# Altium PCB RF-UNIT.PcbDoc (part 3 of 4)
Units mm, origin at the board's own origin, x right, y up, seen from the top; angles counter-clockwise.
Board outline 187 x 77 mm, 2 copper layers (Top Layer, Top, Bottom Layer, Bottom); 271 components, 171 nets, 804 pads, 2169 vias.
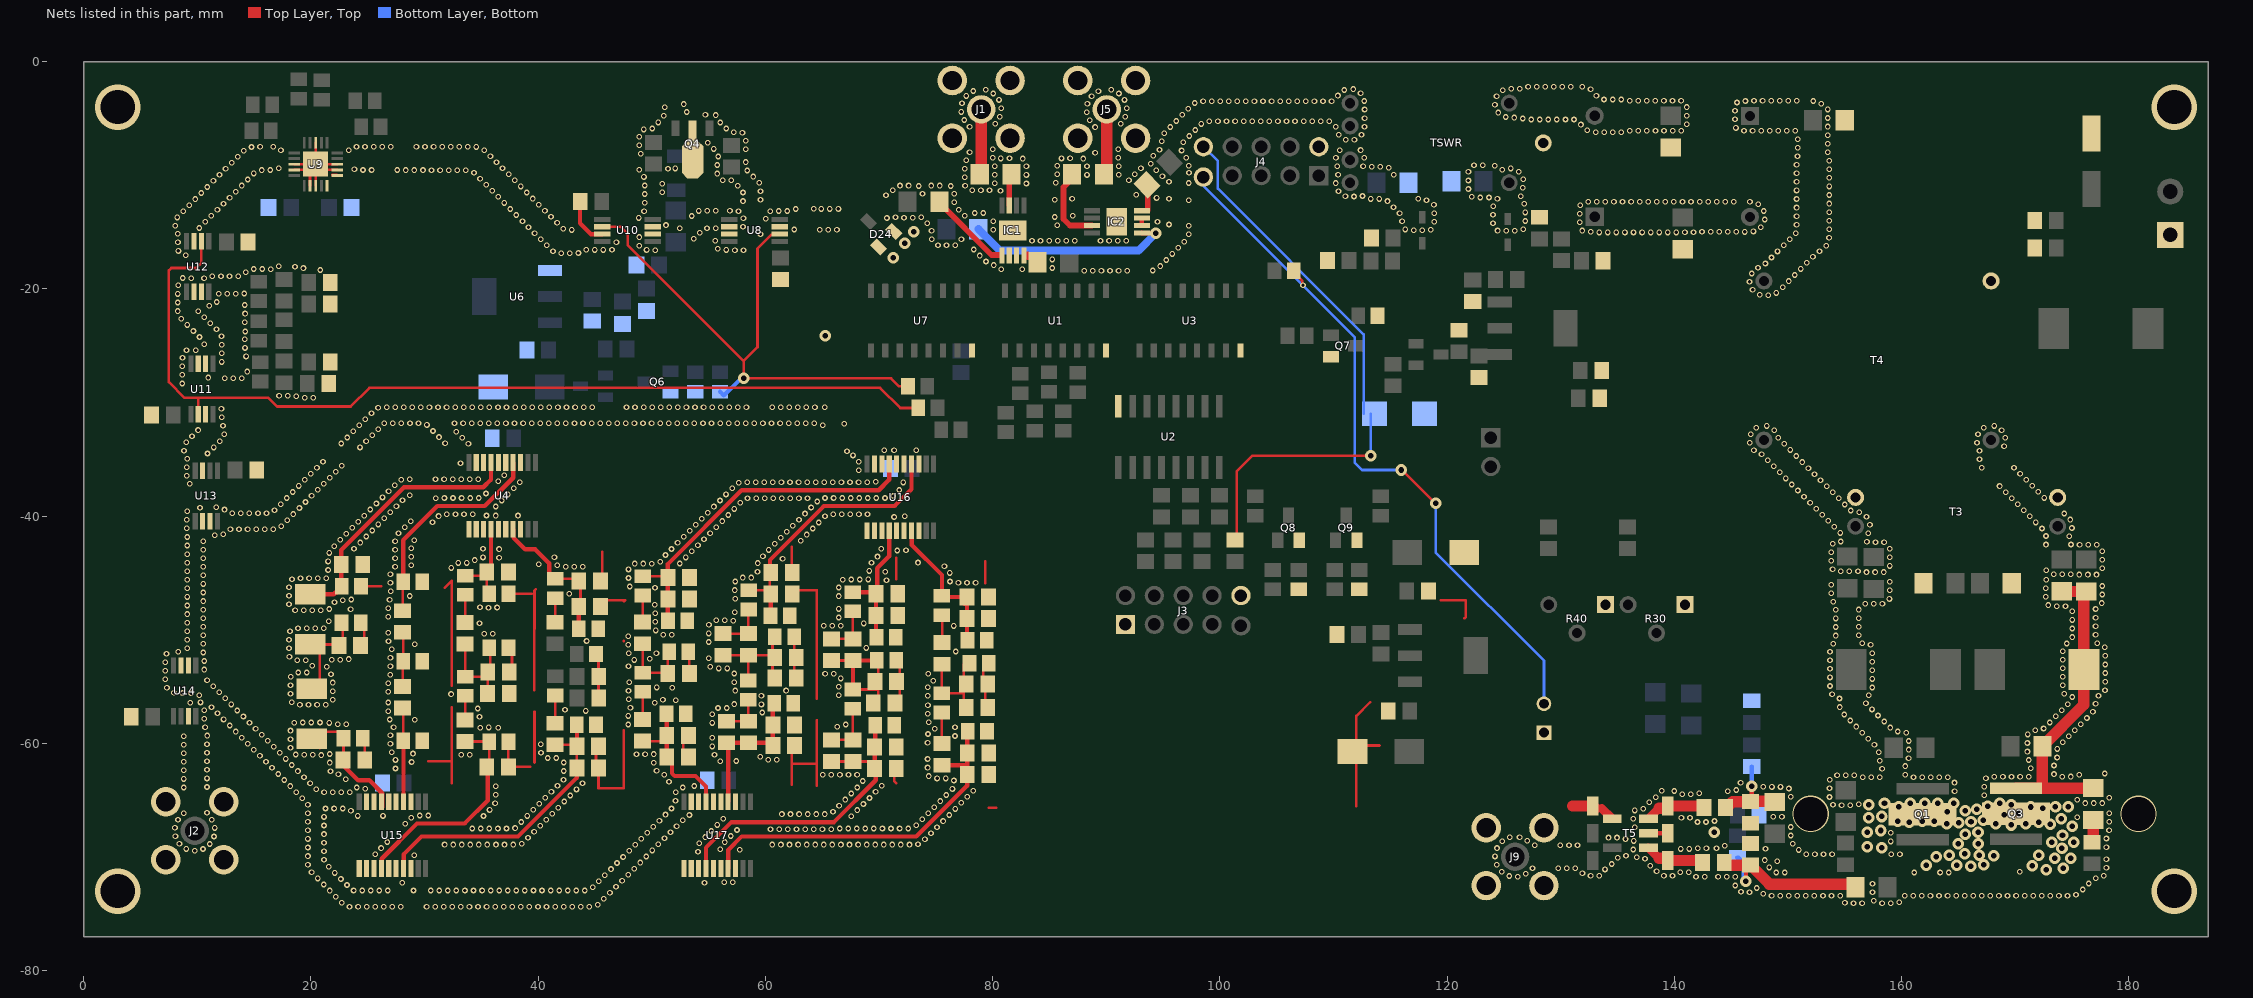
[diagram p3: the nets of this part, all layers, seen from the top]

## Via types
v1: diameter 0.5, hole 0.3, Top Layer, Top to Bottom Layer, Bottom, tented both sides, 1697 vias
v2: diameter 0.5, hole 0.3, Top Layer, Top to Bottom Layer, Bottom, 318 vias
v3: diameter 1.016, hole 0.486, Top Layer, Top to Bottom Layer, Bottom, tented both sides, 136 vias
v4: diameter 0.8, hole 0.486, Top Layer, Top to Bottom Layer, Bottom, tented both sides, 12 vias
v5: diameter 4, hole 3, Top Layer, Top to Bottom Layer, Bottom, 4 vias
v6: diameter 3.2, hole 3, Top Layer, Top to Bottom Layer, Bottom, 2 vias

## Nets (pads, with @x,y where several pads share a name; then routed paths per layer and width w, separated by ;. In a path a pad name is that pad's centre, name@x,y a point inside that pad or via, vN(x,y) a via of type N, cw(c..) or ccw(c..) an arc to the next point about the centre after c; other vN are vias at no path point) (continued)
GND: C1.1 C2.1 C3.1 C4.1 C7.1 C13.1 C14.1 C15.1 C22.1 C23.1 C24.1 C25.1 C26.1 C27.1 C34.1 C35.1 C36.1 C37.1 C39.1 C46.1 C47.1 C48.1 C49.1 C50.1 C51.1 C60.1 C61.1 C62.1 C63.1 C64.1 C65.1 C74.1 C75.1 C76.1 C77.1 C78.1 C79.1 C88.1 C89.1 C90.1 C95.2 C96.1 C97.2 C100.2 C104.1 C105.2 C107.1 C108.1 C109.1 C110.1 C113.2 C114.2 C115.1 C116.2 C117.1 C118.1 C119.2 C121.1 C122.1 C123.1 C124.1 C125.1 C126.1 C127.1 C128.2 C129.2 C130.1 C131.1 C132.1 C133.1 C134.1 C135.1 C136.1 C137.2 C139.1 C140.1 C141.1 C142.1 D2.2 D24.1 D24.2 IC1.6 IC1.7 IC1.9 IC2.6 IC2.7 IC2.9 J1.1 J1.2 J1.3 J1.4 J2.1 J2.2 J2.3 J2.4 J3.1 J3.10 J4.2 J5.1 J5.2 J5.3 J5.4 J8.1 J9.1 J9.2 J9.3 J9.4 L1.1 L2.1 L3.1 L4.1 L5.1 L6.1 L9.1 L10.1 L11.1 L14.1 L15.1 L16.1 L19.1 L20.1 L21.1 L24.1 L25.1 L26.1 L29.1 L30.1 L31.1 L34.1 L35.1 L36.1 Q1.2 Q3.2 Q4.0 Q4.2 Q6.2 Q7.2 Q8.2 Q9.2 R2.2 R6.1 R14.1 R30.1 R33.1 R36.2 R40.1 R42.1 R43.2 R45.1 R53.2 R54.1 R55.2 R56.2 R70.1 T3.2 T3.3 T4.4 T5.2 T5.4 T5.8 T5.11 TSWR.7 U1.8 U2.8 U3.8 U4.3 U4.5 U4.6 U4.8 U4.9 U4.11 U4.12 U4.13 U4.15 U4.16 U4.18 U6.1 U7.8 U8.3 U8.6 U8.7 U9.3 U9.4 U9.7 U9.8 U9.10 U9.11 U9.12 U9.13 U9.18 U9.21 U10.3 U10.6 U10.7 U11.3 U11.6 U11.7 U12.3 U12.6 U12.7 U13.3 U13.6 U13.7 U14.3 U14.6 U14.7 U15.3 U15.5 U15.6 U15.8 U15.9 U15.11 U15.12 U15.13 U15.15 U15.16 U15.18 U16.3 U16.5 U16.6 U16.8 U16.9 U16.11 U16.12 U16.13 U16.15 U16.16 U16.18 U17.3 U17.5 U17.6 U17.8 U17.9 U17.11 U17.12 U17.13 U17.15 U17.16 U17.18 | length 153.1
  Top Layer, Top w0.23: U9.4@18.522,-9.529 19.922,-9.529 U9.7@19.922,-10.929 ; U9.3@18.522,-9.029 U9.21@20.422,-9.029 ; U9.8@20.422,-10.929 U9.21@20.422,-9.029 ; U9.18@20.422,-7.129 U9.21@20.422,-9.029 ; U9.21@20.922,-9.529 U9.12@22.322,-9.529 ; U9.11@21.902,-9.964 U9.11@22.257,-9.964 ; U9.13@22.322,-9.029 U9.21@20.422,-9.029 ; L35.1@24.397,-49.398 24.709,-49.711 C89.1@24.709,-51.303 ; L34.1@24.416,-46.173 26.208,-46.173 ; L36.1@24.575,-59.558 24.733,-59.717 C90.1@24.733,-61.463 ; 30.321,-61.59 32.39,-61.59 ; 31.796,-46.3 32.385,-45.71 32.385,-47.615 32.39,-47.62 32.39,-54.918 32.385,-54.923 ; 32.385,-56.823 32.39,-56.828 32.39,-61.59 ; 32.39,-63.495 32.39,-61.59 ; L6.1@37.387,-59.838 C15.1@37.387,-62.06 39.297,-62.06 ; L5.1@37.387,-51.583 37.699,-51.895 C14.1@37.699,-53.488 ; L4.1@37.387,-46.82 37.392,-46.815 39.419,-46.815 ; 39.673,-57.229 39.678,-57.234 39.678,-61.679 ; 39.673,-55.329 39.673,-49.937 39.678,-49.932 39.678,-46.556 39.8,-46.434 ; C24.1@45.089,-60.125 45.089,-61.805 45.314,-62.03 45.314,-63.935 47.541,-63.935 47.541,-58.855 47.536,-58.85 ; L10.1@45.089,-52.136 45.309,-52.356 C26.1@45.309,-55.946 ; C22.1@45.426,-47.311 45.509,-47.394 47.652,-47.394 47.541,-47.504 ; C25.1@45.631,-45.361 45.631,-43.138 ; 47.536,-50.989 47.541,-50.984 ; C36.1@52.777,-59.802 52.777,-61.481 C39.1@53.002,-61.707 ; C34.1@53.135,-46.784 C34.1@53.14,-46.779 ; L15.1@53.227,-51.945 53.315,-52.033 C35.1@53.315,-53.85 ; C46.1@62.081,-46.525 62.085,-46.52 64.528,-46.52 64.533,-46.525 64.533,-50.018 64.528,-50.023 64.528,-56.05 ; C51.1@62.213,-59.901 62.306,-59.993 62.306,-61.806 ; 62.306,-63.619 62.306,-61.806 ; C49.1@62.306,-44.62 62.306,-42.715 ; C50.1@62.526,-54.422 62.526,-50.617 L20.1@62.531,-50.612 ; 64.528,-57.95 64.533,-57.955 64.533,-61.806 ; 64.533,-63.711 64.533,-61.806 ; C65.1@71.357,-61.595 71.357,-63.341 71.516,-63.5 ; L25.1@71.516,-52.705 71.828,-53.017 C64.1@71.828,-56.515 ; 71.516,-45.561 71.516,-43.656 ; L30.1@79.191,-53.032 79.191,-54.783 79.345,-54.937 C78.1@79.345,-56.842 ; 79.35,-45.888 79.35,-43.983 ; 79.661,-65.659 80.335,-65.659 ; 112.002,-65.522 112.021,-65.503 112.021,-61.511 112.09,-61.511 C100.2@112.09,-59.871 ; 113.221,-56.381 112.01,-57.592 112.01,-60.191 114.054,-60.191 ; 119.45,-47.412 121.649,-47.412 121.654,-47.407 121.654,-48.865 121.519,-49 ; 62.306,-61.806 64.533,-61.806
  Top Layer, Top w0.381: U9.21@19.922,-9.529 U9.21@20.422,-9.029 U9.21@20.922,-9.529 ; C135.1@43.7,-12.319 43.688,-12.331 43.688,-14.224 44.648,-15.184 U10.3@45.654,-15.184 ; IC2.6@93.132,-14.422 IC2.7@93.132,-13.772 ; T5.8@137.716,-67.915 T5.2@139.427,-67.915
  Top Layer, Top w0.76: 133.6,-65.708 T5.11@134.537,-66.645
  Top Layer, Top w1: 131.04,-65.515 T5.4@132.826,-65.515 T5.4@133.02,-65.708
  other v1: 23.397,-74.368 24.151,-74.368 24.905,-74.368 25.659,-74.368 26.413,-74.368 27.167,-74.368 27.921,-74.368 30.183,-74.368 30.937,-74.368 31.691,-74.368 32.445,-74.368 33.199,-74.368 33.953,-74.368 34.707,-74.368 35.461,-74.368 36.215,-74.368 36.969,-74.368 37.723,-74.368 38.477,-74.368 39.231,-74.368 39.985,-74.368 40.739,-74.368 41.493,-74.368 42.247,-74.368 43.001,-74.368 43.755,-74.368 44.509,-74.368 45.247,-74.215 155.769,-74.058 156.523,-74.058 158.283,-74.058 159.037,-74.058 22.728,-74.021 155.015,-74.03 159.789,-73.993 157.556,-73.858 45.788,-73.688 22.195,-73.488 148.557,-73.409 149.311,-73.409 150.065,-73.409 150.819,-73.409 151.573,-73.409 152.327,-73.409 153.081,-73.409 153.835,-73.409 154.589,-73.409 160.276,-73.417 161.03,-73.412 161.784,-73.412 162.538,-73.412 163.292,-73.411 164.046,-73.411 164.8,-73.41 165.554,-73.41 166.308,-73.41 167.062,-73.409 167.816,-73.409 168.57,-73.409 169.324,-73.409 170.078,-73.409 170.832,-73.409 171.586,-73.409 172.34,-73.409 173.094,-73.409 173.848,-73.409 174.602,-73.409 175.352,-73.328 147.822,-73.239 46.321,-73.155 146.616,-73.113 157.439,-73.113 145.864,-73.06 21.661,-72.955 23.756,-72.952 24.51,-72.952 25.264,-72.952 26.018,-72.952 26.772,-72.952 29.034,-72.952 30.542,-72.952 31.296,-72.952 32.05,-72.952 32.804,-72.952 33.558,-72.952 34.312,-72.952 35.066,-72.952 35.82,-72.952 36.574,-72.952 37.328,-72.952 38.082,-72.952 38.836,-72.952 39.59,-72.952 40.344,-72.952 41.098,-72.952 41.852,-72.952 42.606,-72.952 43.36,-72.952 44.114,-72.952 175.947,-72.865 147.266,-72.73 44.81,-72.663 46.854,-72.622 145.352,-72.507 23.178,-72.468 21.128,-72.422 157.439,-72.359 176.48,-72.331 28.037,-72.261 54.644,-72.261 56.376,-72.236 57.13,-72.226 45.344,-72.13 47.387,-72.089 22.644,-71.935 20.595,-71.889 177.076,-71.87 141.91,-71.749 142.664,-71.749 143.848,-71.749 144.602,-71.749 145.356,-71.753 126.219,-71.725 125.467,-71.671 177.801,-71.663 132.629,-71.654 133.383,-71.642 139.085,-71.654 139.839,-71.654 45.877,-71.596 47.92,-71.556 126.93,-71.474 22.111,-71.402 131.911,-71.425 20.062,-71.355 148.962,-71.361 149.716,-71.361 161.127,-71.365 163.389,-71.364 164.143,-71.363 140.524,-71.338 141.278,-71.338 124.811,-71.3 170.413,-71.299 138.438,-71.266 133.901,-71.094 46.41,-71.063 48.453,-71.023 127.517,-71.001 129.779,-71.001 130.533,-71.001 131.287,-71.001 178.029,-70.944 148.351,-70.919 21.578,-70.869 137.869,-70.771 19.739,-70.674 124.37,-70.689 134.486,-70.619 46.943,-70.53 48.986,-70.489 149.054,-70.365 147.963,-70.272 21.155,-70.245 178.029,-70.19 137.422,-70.164 135.012,-70.079 136.68,-70.029 47.476,-69.997 49.52,-69.956 124.216,-69.95 19.739,-69.92 135.744,-69.899 29.09,-69.847 25.657,-69.757 151.621,-69.748 152.375,-69.748 153.129,-69.748 153.883,-69.748 159.102,-69.748 159.856,-69.748 54.07,-69.536 21.155,-69.491 9.766,-69.458 48.009,-69.464 50.053,-69.423 150.963,-69.379 57.753,-69.36 56.03,-69.328 136.378,-69.339 10.504,-69.3 9.031,-69.29 140.566,-69.291 141.32,-69.291 148.027,-69.262 142.071,-69.221 142.825,-69.221 143.712,-69.226 26.179,-69.213 124.39,-69.217 19.739,-69.166 178.029,-69.13 144.437,-69.019 127.71,-68.953 129.972,-68.953 130.726,-68.953 131.48,-68.953 48.542,-68.931 31.766,-68.907 32.52,-68.907 33.274,-68.907 34.028,-68.907 34.782,-68.907 35.536,-68.907 36.29,-68.907 37.044,-68.907 37.798,-68.907 50.586,-68.89 60.618,-68.907 61.372,-68.907 62.126,-68.907 62.88,-68.907 63.634,-68.907 64.388,-68.907 65.142,-68.907 65.896,-68.907 66.65,-68.907 67.404,-68.907 68.158,-68.907 68.912,-68.907 69.666,-68.907 70.42,-68.907 71.174,-68.907 71.928,-68.907 72.682,-68.907 73.435,-68.886 11.111,-68.853 150.43,-68.845 8.432,-68.833 38.547,-68.822 54.187,-68.791 21.155,-68.737 56.424,-68.685 26.712,-68.68 124.853,-68.622 159.038,-68.632 136.431,-68.586 127.057,-68.577 74.042,-68.438 19.739,-68.412 135.698,-68.424 49.076,-68.397 51.119,-68.357 178.029,-68.376 39.109,-68.319 134.202,-68.291 134.956,-68.291 125.521,-68.272 54.706,-68.245 126.377,-68.25 11.476,-68.193 8.077,-68.168 56.958,-68.152 150.258,-68.111 21.155,-67.983 74.575,-67.905 159.06,-67.879 49.609,-67.864 51.652,-67.824 39.642,-67.786 55.239,-67.712 19.739,-67.658 178.26,-67.659 57.499,-67.628 60.452,-67.564 61.214,-67.564 61.976,-67.564 62.738,-67.564 63.5,-67.564 64.262,-67.564 65.024,-67.564 65.786,-67.564 34.201,-67.491 34.955,-67.491 35.709,-67.491 36.463,-67.491 37.217,-67.491 66.535,-67.491 67.289,-67.491 68.043,-67.491 68.797,-67.491 69.551,-67.491 70.305,-67.491 71.059,-67.491 71.813,-67.491 72.567,-67.491 11.525,-67.441 37.97,-67.454 8.036,-67.415 75.108,-67.372 136.522,-67.379 150.258,-67.357 50.142,-67.331 52.185,-67.291 40.175,-67.253 21.155,-67.229 73.267,-67.21 55.772,-67.178 28.311,-67.08 38.504,-66.921 142.036,-66.923 142.79,-66.923 19.739,-66.904 178.28,-66.905 75.641,-66.838 143.538,-66.832 50.675,-66.798 52.719,-66.757 11.267,-66.732 8.308,-66.711 40.708,-66.719 73.8,-66.677 56.305,-66.645 136.378,-66.639 141.378,-66.555 28.846,-66.549 140.624,-66.542 175.452,-66.516 21.155,-66.475 148.714,-66.462 149.468,-66.462 67.566,-66.404 24.118,-66.385 26.349,-66.385 35.194,-66.391 39.037,-66.388 29.573,-66.348 30.327,-66.348 53.318,-66.3 76.174,-66.305 51.208,-66.265 61.459,-66.221 62.213,-66.221 62.967,-66.221 63.721,-66.221 64.475,-66.221 65.229,-66.221 41.241,-66.186 8.807,-66.146 19.739,-66.15 74.333,-66.144 178.28,-66.151 10.854,-66.101 65.954,-66.014 23.524,-65.921 136.529,-65.9 68.099,-65.871 35.727,-65.858 39.57,-65.855 76.707,-65.772 137.266,-65.741 21.286,-65.732 22.04,-65.732 22.794,-65.732 51.741,-65.732 41.774,-65.653 74.866,-65.611 66.487,-65.48 154.717,-65.446 155.471,-65.446 19.739,-65.396 153.965,-65.403 156.221,-65.368 68.632,-65.338 40.103,-65.322 36.21,-65.279 176.166,-65.255 176.92,-65.255 177.674,-65.255 77.24,-65.239 137.78,-65.189 42.307,-65.12 75.399,-65.077 52.089,-65.063 175.468,-64.969 67.02,-64.947 19.247,-64.825 69.166,-64.805 40.636,-64.788 178.27,-64.794 138.377,-64.729 77.774,-64.706 150.258,-64.703 153.653,-64.716 42.841,-64.587 167.286,-64.572 75.932,-64.544 36.268,-64.527 140.696,-64.491 141.45,-64.479 67.554,-64.414 142.199,-64.395 21.162,-64.316 21.916,-64.316 22.67,-64.316 23.424,-64.316 18.713,-64.292 52.107,-64.309 69.699,-64.272 41.169,-64.255 140.004,-64.191 144.701,-64.21 164.665,-64.204 78.3,-64.166 138.896,-64.182 145.448,-64.104 20.461,-64.037 43.374,-64.054 76.465,-64.011 24.786,-63.996 150.084,-63.969 153.653,-63.962 8.807,-63.884 24.041,-63.883 52.729,-63.883 68.087,-63.881 10.854,-63.839 148.588,-63.834 149.342,-63.834 147.834,-63.831 167.262,-63.818 18.18,-63.759 36.268,-63.773 53.735,-63.753 70.23,-63.737 41.703,-63.722 19.928,-63.504 43.907,-63.52 145.83,-63.454 164.657,-63.45 51.521,-63.373 68.582,-63.312 76.597,-63.269 17.647,-63.226 153.678,-63.209 42.236,-63.189 8.807,-63.13 23.055,-63.144 10.854,-63.085 75.111,-63.086 75.865,-63.086 167.425,-63.082 19.395,-62.971 156.569,-62.969 157.323,-62.969 158.077,-62.969 161.052,-62.969 161.806,-62.969 162.56,-62.979 163.314,-62.979 164.068,-62.979 168.165,-62.939 168.919,-62.939 169.673,-62.939 170.427,-62.929 171.181,-62.929 174.135,-62.925 174.889,-62.923 74.387,-62.876 154.323,-62.818 155.077,-62.818 155.831,-62.818 51.092,-62.754 65.054,-62.759 65.808,-62.759 66.562,-62.757 67.316,-62.759 68.07,-62.759 160.33,-62.752 175.626,-62.763 22.426,-62.727 17.114,-62.692 173.416,-62.7 177.876,-62.649 18.862,-62.437 21.729,-62.441 42.25,-62.435 50.425,-62.401 8.807,-62.376 10.854,-62.331 158.282,-62.244 27.445,-62.213 171.368,-62.199 16.581,-62.159 74.276,-62.13 160.33,-61.998 173.416,-61.946 18.329,-61.904 21.669,-61.689 42.25,-61.681 50.164,-61.694 8.807,-61.622 16.048,-61.626 28.861,-61.642 10.854,-61.577 56.02,-61.567 57.436,-61.553 158.067,-61.521 27.445,-61.459 60.255,-61.453 61.009,-61.453 171.199,-61.464 17.796,-61.371 74.276,-61.376 160.614,-61.3 40.852,-61.289 41.606,-61.289 173.687,-61.242 59.557,-61.169 15.515,-61.093 20.922,-61.032 19.415,-60.991 20.169,-60.991 33.234,-61.001 33.988,-61.001 55.526,-60.998 18.661,-60.98 48.657,-60.965 49.411,-60.965 50.164,-60.94 21.669,-60.935 28.99,-60.899 8.807,-60.868 17.262,-60.838 10.854,-60.823 40.251,-60.833 27.114,-60.781 157.992,-60.771 171.078,-60.72 14.981,-60.56 160.62,-60.546 173.706,-60.489 18.202,-60.381 16.729,-60.305 55.327,-60.271 8.807,-60.114 157.609,-60.121 40.24,-60.079 10.854,-60.069 14.448,-60.027 27.002,-60.036 171.078,-59.966 74.276,-59.932 174.182,-59.904 16.196,-59.772 160.62,-59.792 18.202,-59.627 157.076,-59.588 55.327,-59.517 13.915,-59.493 174.715,-59.371 8.807,-59.36 76.688,-59.349 10.872,-59.315 27.002,-59.282 15.663,-59.238 171.105,-59.212 74.314,-59.179 160.41,-59.068 156.543,-59.055 13.382,-58.96 159.664,-58.957 18.202,-58.873 171.755,-58.832 175.248,-58.837 15.13,-58.705 74.902,-58.706 172.497,-58.693 34.911,-58.634 36.483,-58.638 158.994,-58.611 10.685,-58.585 27.277,-58.58 35.664,-58.599 76.688,-58.595 66.339,-58.531 156.009,-58.522 12.849,-58.427 47.928,-58.341 67.068,-58.337 22.357,-58.32 23.111,-58.32 175.781,-58.304 18.538,-58.198 21.613,-58.202 55.327,-58.202 14.597,-58.172 19.291,-58.163 20.045,-58.163 20.799,-58.163 74.388,-58.155 173.03,-58.16 158.461,-58.078 155.476,-57.989 29.141,-57.935 12.316,-57.894 26.952,-57.899 10.604,-57.835 176.314,-57.771 34.841,-57.669 14.063,-57.639 173.563,-57.627 47.928,-57.587 157.928,-57.545 55.327,-57.448 154.943,-57.456 74.301,-57.406 11.782,-57.361 59.735,-57.28 176.839,-57.23 26.806,-57.159 44.185,-57.147 13.53,-57.106 10.604,-57.081 174.096,-57.094 42.367,-57.051 157.394,-57.012 34.694,-56.93 55.834,-56.89 56.588,-56.889 48.123,-56.858 11.249,-56.828 154.564,-56.804 74.308,-56.652 12.997,-56.573 19.037,-56.591 19.791,-56.591 20.545,-56.591 21.299,-56.591 59.654,-56.573 174.629,-56.561 57.257,-56.54 177.072,-56.513 156.861,-56.478 9.395,-56.43 50.272,-56.416 10.287,-56.397 26.806,-56.405 18.313,-56.381 52.1,-56.204 50.983,-56.165 21.914,-56.155 47.964,-56.122 12.464,-56.04 154.539,-56.05 175.025,-55.919 59.654,-55.819 74.301,-55.819 177.331,-55.805 10.183,-55.761 66.467,-55.772 157.113,-55.768 153.882,-55.681 32.338,-55.661 18.202,-55.635 174.325,-55.639 8.699,-55.572 9.453,-55.572 7.946,-55.544 11.931,-55.506 26.806,-55.45 21.93,-55.401 47.953,-55.368 57.359,-55.354 61.821,-55.355 177.907,-55.318 7.332,-55.106 51.803,-55.114 50.431,-55.078 157.426,-55.082 74.301,-55.065 66.467,-55.018 11.398,-54.973 153.698,-54.949 174.185,-54.898 18.202,-54.881 26.806,-54.696 21.93,-54.647 48.029,-54.617 57.257,-54.607 177.912,-54.564 74.777,-54.481 10.864,-54.44 7.172,-54.369 157.426,-54.328 66.637,-54.283 153.698,-54.195 174.185,-54.144 18.232,-54.128 26.982,-53.963 21.773,-53.909 57.259,-53.853 65.254,-53.869 66.008,-53.869 74.336,-53.869 177.912,-53.81 18.892,-53.763 19.646,-53.763 7.172,-53.615 157.426,-53.574 10.604,-53.504 153.698,-53.441 55.899,-53.404 56.653,-53.404 174.185,-53.39 21.403,-53.253 55.16,-53.254 47.953,-53.222 27.002,-53.209 20.126,-53.182 177.912,-53.056 7.176,-52.861 157.426,-52.82 10.604,-52.75 18.797,-52.695 19.551,-52.695 153.698,-52.687 48.454,-52.658 21.829,-52.631 22.583,-52.631 174.185,-52.636 23.336,-52.58 49.831,-52.559 55.009,-52.515 27.002,-52.455 18.114,-52.375 177.912,-52.302 7.289,-52.115 47.97,-52.08 50.414,-52.081 157.426,-52.066 10.528,-52 8.337,-51.947 153.698,-51.933 76.756,-51.917 174.185,-51.882 27.13,-51.712 9.112,-51.635 18.075,-51.622 68.879,-51.599 177.884,-51.549 47.928,-51.327 157.27,-51.328 29.141,-51.268 10.528,-51.246 153.99,-51.238 174.528,-51.211 156.53,-51.182 177.228,-51.177 55.027,-51.076 26.835,-51.018 44.263,-50.988 9.112,-50.881 18.075,-50.868 175.025,-50.643 47.93,-50.573 154.195,-50.512 10.528,-50.492 156.243,-50.485 51.002,-50.436 51.756,-50.436 177.072,-50.439 35.249,-50.344 36.003,-50.344 55.009,-50.323 26.806,-50.265 9.112,-50.127 18.158,-50.119 50.349,-50.06 175.025,-49.889 18.869,-49.867 19.623,-49.867 20.377,-49.867 21.131,-49.867 10.528,-49.738 154.195,-49.758 156.243,-49.731 177.072,-49.685 76.58,-49.666 65.129,-49.641 65.883,-49.641 66.637,-49.658 55.033,-49.569 34.841,-49.432 68.652,-49.446 9.112,-49.373 50.321,-49.306 21.583,-49.264 57.184,-49.208 55.677,-49.176 56.431,-49.176 175.025,-49.135 154.195,-49.004 10.528,-48.984 156.243,-48.977 66.467,-48.924 177.072,-48.931 26.806,-48.855 9.112,-48.619 50.321,-48.552 57.308,-48.465 175.025,-48.381 18.607,-48.295 19.361,-48.295 20.115,-48.295 20.869,-48.295 154.195,-48.25 10.528,-48.23 156.243,-48.223 23.494,-48.199 21.613,-48.171 66.467,-48.17 177.072,-48.177 26.806,-48.101 35.634,-48.059 36.388,-48.039 34.882,-48.014 173.669,-47.926 174.423,-47.926 9.112,-47.865 172.922,-47.828 50.256,-47.801 18.075,-47.76 156.806,-47.722 157.56,-47.722 158.314,-47.722 177.614,-47.653 22.08,-47.579 153.982,-47.527 10.528,-47.476 22.815,-47.411 26.927,-47.357 23.566,-47.337 158.931,-47.287 57.336,-47.26 9.112,-47.111 172.694,-47.109 28.708,-47.034 66.467,-47.037 18.075,-47.006 177.671,-46.901 42.743,-46.829 153.805,-46.794 10.528,-46.722 27.023,-46.609 158.947,-46.534 57.308,-46.507 9.112,-46.357 172.694,-46.355 50.287,-46.294 66.467,-46.283 18.075,-46.252 48.063,-46.191 177.671,-46.147 153.805,-46.04 10.528,-45.968 78.5,-45.874 27.002,-45.856 76.993,-45.873 77.746,-45.853 158.947,-45.78 57.341,-45.753 76.248,-45.754 70.66,-45.653 9.112,-45.603 66.804,-45.609 172.742,-45.603 67.557,-45.574 68.311,-45.574 69.065,-45.573 18.335,-45.545 21.347,-45.479 19.085,-45.467 19.839,-45.467 20.593,-45.467 47.953,-45.445 58.011,-45.407 58.765,-45.407 10.528,-45.214 175.648,-45.143 176.402,-45.143 177.156,-45.143 173.387,-45.126 174.141,-45.126 174.895,-45.126 27.002,-45.102 76.219,-45.001 156.912,-44.922 157.666,-44.922 158.42,-44.922 59.308,-44.884 70.558,-44.906 154.654,-44.86 155.408,-44.86 9.112,-44.849 156.162,-44.852 69.142,-44.823 172.724,-44.766 21.511,-44.743 47.953,-44.691 153.925,-44.664 177.671,-44.591 32.353,-44.559 10.528,-44.46 27.408,-44.466 43.175,-44.456 43.929,-44.456 42.421,-44.444 75.758,-44.404 158.947,-44.382 28.824,-44.337 41.677,-44.321 40.06,-44.237 48.503,-44.175 49.257,-44.175 50.011,-44.194 52.466,-44.167 59.324,-44.13 32.965,-44.119 33.719,-44.119 9.112,-44.095 69.337,-44.094 73.437,-44.085 50.744,-44.018 21.511,-43.989 153.805,-43.92 34.43,-43.867 177.671,-43.837 61.512,-43.756 10.528,-43.706 27.408,-43.712 36.563,-43.652 35.147,-43.635 52.999,-43.634 158.947,-43.628 41.434,-43.607 28.824,-43.583 69.867,-43.558 59.786,-43.534 51.207,-43.423 9.112,-43.341 21.604,-43.24 153.805,-43.166 53.532,-43.1 177.671,-43.083 71.615,-43.025 72.375,-43.015 27.408,-42.958 60.291,-42.975 10.528,-42.952 35.147,-42.881 36.563,-42.898 51.74,-42.89 70.199,-42.881 23.799,-42.862 158.947,-42.874 28.824,-42.829 22.061,-42.641 9.112,-42.587 54.065,-42.567 172.712,-42.505 174.911,-42.499 175.664,-42.515 176.418,-42.515 177.172,-42.518 60.824,-42.441 153.929,-42.422 52.273,-42.357 24.332,-42.329 157.704,-42.294 158.458,-42.299 154.659,-42.233 156.952,-42.241 10.528,-42.198 27.408,-42.204 63.112,-42.157 29.104,-42.129 22.572,-42.086 54.598,-42.034 61.357,-41.908 9.112,-41.833 52.806,-41.823 24.865,-41.796 174.76,-41.76 172.712,-41.751 11.55,-41.691 63.645,-41.624 12.296,-41.582 23.105,-41.553 27.714,-41.515 55.131,-41.501 154.611,-41.48 157.068,-41.496 61.891,-41.375 53.339,-41.29 25.398,-41.262 12.92,-41.16 13.674,-41.16 14.428,-41.16 15.182,-41.16 15.936,-41.16 16.69,-41.16 9.081,-41.08 64.178,-41.09 172.355,-41.087 174.991,-41.042 23.638,-41.02 28.248,-40.982 55.665,-40.968 154.078,-40.947 17.393,-40.886 62.424,-40.842 53.872,-40.757 157.213,-40.756 25.931,-40.729 64.711,-40.557 171.822,-40.554 30.703,-40.529 24.171,-40.487 28.781,-40.449 56.198,-40.435 153.545,-40.414 17.926,-40.353 9.081,-40.326 62.957,-40.309 174.854,-40.301 54.406,-40.224 26.464,-40.196 71.329,-40.08 156.913,-40.065 65.244,-40.024 171.288,-40.021 31.237,-39.996 72.263,-40.005 24.704,-39.953 35.459,-39.948 36.277,-39.953 38.227,-39.953 56.731,-39.902 153.012,-39.881 18.459,-39.819 31.971,-39.824 32.725,-39.824 33.479,-39.824 34.233,-39.824 65.971,-39.824 66.725,-39.824 67.479,-39.824 68.233,-39.824 68.987,-39.824 63.49,-39.776 174.319,-39.77 13.08,-39.744 13.834,-39.744 14.588,-39.744 15.342,-39.744 16.096,-39.744 54.939,-39.691 26.998,-39.663 156.269,-39.671 9.112,-39.573 155.534,-39.507 16.801,-39.475 170.755,-39.488 12.398,-39.423 25.237,-39.42 57.264,-39.368 152.479,-39.347 18.992,-39.286 10.242,-39.252 64.023,-39.242 11.674,-39.213 36.268,-39.156 55.472,-39.158 27.531,-39.13 155,-38.974 17.334,-38.942 170.222,-38.955 25.77,-38.887 57.797,-38.835 151.945,-38.814 19.525,-38.753 64.556,-38.709 36.801,-38.623 56.005,-38.624 28.064,-38.597 154.467,-38.441 17.867,-38.409 31.001,-38.421 31.754,-38.408 32.508,-38.408 33.262,-38.408 34.016,-38.408 34.77,-38.408 58.431,-38.427 59.185,-38.427 59.939,-38.427 60.693,-38.427 61.447,-38.427 62.201,-38.427 62.955,-38.427 63.709,-38.427 65.247,-38.408 66.001,-38.408 66.755,-38.408 67.509,-38.408 68.263,-38.408 69.017,-38.408 69.771,-38.408 70.525,-38.408 169.689,-38.422 172.562,-38.4 26.304,-38.354 151.412,-38.281 71.258,-38.23 20.059,-38.22 28.688,-38.173 37.334,-38.09 56.538,-38.091 35.411,-38.01 153.934,-37.907 18.4,-37.875 169.156,-37.888 172.029,-37.867 26.837,-37.821 150.879,-37.748 71.791,-37.697 20.592,-37.687 37.867,-37.556 57.071,-37.558 153.401,-37.374 18.933,-37.342 168.623,-37.355 171.496,-37.333 27.37,-37.288 150.346,-37.215 9.333,-37.158 21.125,-37.154 57.648,-37.073 38.388,-37.012 58.4,-37.011 59.154,-37.011 59.908,-37.011 60.662,-37.011 61.416,-37.011 62.17,-37.011 62.924,-37.011 63.678,-37.011 64.432,-37.011 65.186,-37.011 65.94,-37.011 66.694,-37.011 67.448,-37.011 68.202,-37.011 68.956,-37.011 72.149,-37.033 69.709,-36.985 36.477,-36.944 152.868,-36.841 19.466,-36.809 27.953,-36.809 170.963,-36.8 28.705,-36.757 30.967,-36.757 31.721,-36.757 32.475,-36.757 33.229,-36.757 33.983,-36.757 34.737,-36.757 149.813,-36.682 21.658,-36.62 9.081,-36.447 37.01,-36.41 152.335,-36.308 20,-36.276 170.43,-36.267 149.28,-36.148 22.191,-36.087 68.218,-35.969 151.801,-35.775 20.533,-35.743 167.043,-35.737 169.897,-35.734 9.081,-35.693 148.747,-35.615 22.724,-35.554 33.166,-35.338 151.268,-35.242 21.066,-35.21 68.218,-35.215 148.213,-35.082 166.858,-35.006 9.112,-34.94 150.735,-34.709 67.71,-34.658 147.679,-34.55 10.904,-34.485 67.183,-34.29 166.858,-34.252 8.836,-34.238 70.47,-34.214 71.329,-34.204 73.279,-34.204 147.005,-34.212 150.202,-34.175 11.438,-33.952 24.324,-33.955 169.019,-33.857 149.669,-33.642 22.665,-33.61 33.866,-33.627 31.811,-33.575 146.639,-33.553 166.637,-33.531 9.019,-33.507 11.971,-33.419 24.857,-33.421 149.136,-33.109 169.131,-33.111 23.199,-33.077 33.333,-33.094 31.278,-33.042 9.536,-32.958 25.39,-32.888 146.72,-32.803 12.377,-32.784 166.728,-32.783 23.732,-32.544 32.8,-32.56 30.745,-32.509 10.069,-32.425 148.8,-32.434 168.8,-32.434 25.923,-32.355 147.21,-32.23 167.23,-32.22 148.144,-32.062 168.144,-32.062 12.264,-32.038 24.265,-32.011 65.044,-31.992 30.212,-31.975 66.929,-31.874 26.458,-31.823 27.212,-31.823 27.966,-31.823 28.72,-31.823 29.474,-31.823 32.642,-31.823 33.396,-31.823 34.15,-31.823 34.904,-31.823 35.658,-31.823 36.412,-31.823 37.166,-31.823 37.92,-31.823 38.674,-31.823 39.428,-31.823 40.182,-31.823 40.936,-31.823 41.69,-31.823 42.444,-31.823 43.198,-31.823 43.952,-31.823 44.706,-31.823 45.46,-31.823 46.214,-31.823 46.968,-31.823 47.722,-31.823 48.476,-31.823 49.23,-31.823 49.984,-31.823 50.738,-31.823 51.492,-31.823 52.246,-31.823 53,-31.823 53.754,-31.823 54.508,-31.823 55.262,-31.823 56.016,-31.823 56.77,-31.823 57.524,-31.823 58.278,-31.823 59.032,-31.823 59.786,-31.823 60.54,-31.823 61.294,-31.823 62.048,-31.823 62.802,-31.823 63.556,-31.823 64.31,-31.823 24.798,-31.478 12.158,-31.292 25.331,-30.944 12.128,-30.538 25.912,-30.463 26.663,-30.407 27.417,-30.407 28.171,-30.407 28.925,-30.407 29.679,-30.407 30.433,-30.407 31.187,-30.407 31.941,-30.407 32.695,-30.407 33.449,-30.407 34.203,-30.407 34.957,-30.407 35.711,-30.407 36.465,-30.407 37.219,-30.407 37.973,-30.407 38.727,-30.407 39.481,-30.407 40.235,-30.407 40.989,-30.407 41.743,-30.407 42.497,-30.407 43.251,-30.407 44.005,-30.407 44.759,-30.407 47.775,-30.407 48.529,-30.407 49.283,-30.407 50.037,-30.407 50.791,-30.407 51.545,-30.407 52.299,-30.407 53.053,-30.407 53.807,-30.407 54.561,-30.407 55.315,-30.407 56.069,-30.407 56.823,-30.407 57.577,-30.407 58.331,-30.407 60.593,-30.407 61.347,-30.407 62.101,-30.407 62.855,-30.407 63.609,-30.407 64.363,-30.407 65.218,-30.417 19.45,-29.585 20.204,-29.585 18.706,-29.462 17.2,-29.419 17.954,-29.419 8.68,-28.325 12.418,-27.871 13.172,-27.871 13.926,-27.871 10.973,-27.805 8.67,-27.571 14.388,-27.276 8.67,-26.817 12.158,-26.428 8.7,-26.063 14.294,-25.944 12.158,-25.674 9.861,-25.404 9.053,-25.397 14.199,-25.196 12.158,-24.92 10.62,-24.862 14.192,-24.442 10.197,-24.238 12.133,-24.167 14.224,-23.749 9.664,-23.705 11.69,-23.557 9.131,-23.172 11.157,-23.023 14.192,-22.927 8.598,-22.639 10.623,-22.49 14.209,-22.173 8.289,-21.951 10.09,-21.957 11.044,-21.498 14.192,-21.419 8.289,-21.197 11.714,-21.151 148.259,-20.573 147.507,-20.511 8.289,-20.443 11.887,-20.418 12.641,-20.418 13.395,-20.418 14.149,-20.408 148.981,-20.357 146.887,-20.083 149.534,-19.844 8.319,-19.689 146.617,-19.379 150.067,-19.311 9.48,-19.059 10.598,-19.057 8.71,-19.045 11.331,-18.88 12.085,-18.88 12.839,-18.88 13.593,-18.88 150.6,-18.778 146.8,-18.648 14.26,-18.527 20.832,-18.338 14.962,-18.254 15.716,-18.254 16.47,-18.26 151.133,-18.244 19.344,-18.167 147.365,-18.148 18.6,-18.045 17.18,-18.006 148.017,-17.768 151.667,-17.711 148.55,-17.235 152.2,-17.178 8.992,-17.048 42.039,-16.858 42.793,-16.858 43.547,-16.845 149.083,-16.702 152.777,-16.693 41.307,-16.678 8.344,-16.661 50.297,-16.603 57.322,-16.603 58.076,-16.603 44.991,-16.573 45.745,-16.573 49.544,-16.573 56.569,-16.573 44.238,-16.542 46.499,-16.549 55.821,-16.476 153.36,-16.215 48.892,-16.194 40.753,-16.166 149.616,-16.169 8.299,-15.908 46.893,-15.906 55.591,-15.758 40.22,-15.633 150.149,-15.636 53.696,-15.59 153.618,-15.506 48.899,-15.44 59.57,-15.182 8.289,-15.155 39.687,-15.1 150.682,-15.103 54.229,-15.057 133.391,-15.031 134.145,-15.031 134.899,-15.031 135.653,-15.031 136.407,-15.031 137.161,-15.031 137.915,-15.031 138.669,-15.031 139.423,-15.031 140.177,-15.031 140.931,-15.024 141.685,-15.016 132.639,-14.976 142.438,-14.984 143.192,-14.984 143.946,-14.985 144.7,-14.985 145.454,-14.985 146.208,-14.986 146.961,-14.944 131.893,-14.868 42.947,-14.81 153.629,-14.753 42.199,-14.717 10.178,-14.638 52.461,-14.651 54.866,-14.653 55.62,-14.653 39.154,-14.567 147.613,-14.565 58.032,-14.534 8.05,-14.439 51.251,-14.385 150.756,-14.352 41.666,-14.183 131.674,-14.146 10.711,-14.105 38.621,-14.033 153.629,-13.999 147.949,-13.891 58.069,-13.776 48.865,-13.755 8.24,-13.71 41.133,-13.65 150.756,-13.598 11.244,-13.572 53.527,-13.585 38.088,-13.5 131.674,-13.392 153.629,-13.245 8.758,-13.162 57.633,-13.161 49.324,-13.156 54.136,-13.141 147.859,-13.142 40.6,-13.117 54.89,-13.115 55.644,-13.115 56.88,-13.125 11.777,-13.039 37.554,-12.967 150.756,-12.844 9.291,-12.629 131.727,-12.64 40.067,-12.584 147.376,-12.563 12.31,-12.506 153.629,-12.491 37.021,-12.434 49.396,-12.406 132.421,-12.345 133.175,-12.338 133.929,-12.338 134.683,-12.339 135.437,-12.339 136.191,-12.339 136.945,-12.34 137.699,-12.34 138.453,-12.341 139.207,-12.341 139.961,-12.341 140.715,-12.342 141.469,-12.342 142.223,-12.342 142.977,-12.343 143.731,-12.343 144.485,-12.343 145.239,-12.344 146.655,-12.344 58.032,-12.272 59.57,-12.166 9.824,-12.096 150.756,-12.09 39.534,-12.051 12.843,-11.972 36.488,-11.901 153.629,-11.737 49.396,-11.652 10.358,-11.563 39,-11.518 58.032,-11.518 50.934,-11.492 13.376,-11.439 59.57,-11.412 35.955,-11.368 150.756,-11.336 10.891,-11.03 38.467,-10.985 153.629,-10.983 13.91,-10.906 57.576,-10.918 49.396,-10.898 35.422,-10.835 50.934,-10.738 59.459,-10.666 150.756,-10.582 11.424,-10.496 37.934,-10.451 56.991,-10.442 56.237,-10.435 14.443,-10.373 34.889,-10.301 153.629,-10.229 49.313,-10.148 58.946,-10.114 11.957,-9.963 37.401,-9.918 14.976,-9.84 55.759,-9.852 150.756,-9.828 34.356,-9.768 58.413,-9.581 15.669,-9.543 16.423,-9.535 24.586,-9.534 25.34,-9.535 27.602,-9.539 28.356,-9.541 29.11,-9.542 29.864,-9.544 30.618,-9.545 31.372,-9.547 32.126,-9.548 32.88,-9.549 33.633,-9.551 48.901,-9.517 23.833,-9.484 153.629,-9.475 12.49,-9.43 51.43,-9.435 17.161,-9.379 36.868,-9.385 52.07,-9.398 55.759,-9.098 150.756,-9.074 13.023,-8.897 36.335,-8.852 58.287,-8.838 153.623,-8.721 13.557,-8.364 55.853,-8.349 35.801,-8.319 150.843,-8.325 49.044,-8.107 153.513,-7.975 14.09,-7.831 17.364,-7.802 23.326,-7.81 35.264,-7.789 58.287,-7.706 55.451,-7.681 150.872,-7.572 14.775,-7.515 15.528,-7.498 24.013,-7.499 29.291,-7.495 30.045,-7.497 30.799,-7.498 31.553,-7.5 32.307,-7.501 33.061,-7.502 33.815,-7.504 34.566,-7.505 16.675,-7.495 24.767,-7.487 25.521,-7.488 26.275,-7.489 27.029,-7.491 48.901,-7.367 153.513,-7.221 54.918,-7.148 58.287,-6.952 150.872,-6.818 48.901,-6.613 153.513,-6.467 57.983,-6.262 57.23,-6.214 146.13,-6.089 146.884,-6.096 147.638,-6.096 148.392,-6.096 149.146,-6.096 149.9,-6.096 150.654,-6.096 49.289,-5.966 50.038,-5.884 56.552,-5.886 145.42,-5.834 153.513,-5.713 50.571,-5.351 56.016,-5.356 145.34,-5.084 153.513,-4.959 51.049,-4.768 55.641,-4.702 54.724,-4.667 53.094,-4.432 145.34,-4.33 153.498,-4.205 51.14,-4.019 52.806,-3.736 152.943,-3.695 145.514,-3.596 146.256,-3.461 152.226,-3.461 147.01,-3.454 147.764,-3.454 148.518,-3.454 149.272,-3.454 150.026,-3.454 150.78,-3.454
  other v2: 88.07,-18.397 88.824,-18.397 89.578,-18.397 90.332,-18.397 91.086,-18.397 91.84,-18.397 94.101,-18.383 80.759,-18.273 82.623,-18.273 85.258,-18.16 94.746,-17.991 80.103,-17.902 79.415,-17.593 95.279,-17.458 85.258,-17.406 78.875,-17.067 95.812,-16.925 78.342,-16.534 96.345,-16.392 75.19,-16.146 75.944,-16.146 76.698,-16.146 96.879,-15.859 83.463,-15.766 84.217,-15.766 84.971,-15.766 85.725,-15.766 86.479,-15.766 87.233,-15.766 89.495,-15.766 90.249,-15.766 91.003,-15.766 91.757,-15.766 74.631,-15.64 77.256,-15.638 97.254,-15.205 125.195,-14.891 125.949,-14.891 74.629,-14.886 124.441,-14.869 117.054,-14.839 117.808,-14.839 64.79,-14.806 65.544,-14.806 66.298,-14.806 80.057,-14.795 118.56,-14.792 62.529,-14.774 116.303,-14.766 126.691,-14.757 97.264,-14.451 85.696,-14.393 95.522,-14.334 74.245,-14.237 124.039,-14.232 94.512,-14.101 118.866,-14.103 116.038,-14.06 80.057,-14.041 126.866,-14.024 60.041,-13.824 70.699,-13.758 72.204,-13.733 72.958,-13.733 71.451,-13.704 73.712,-13.704 85.464,-13.676 87.053,-13.576 77.546,-13.564 124.039,-13.478 115.817,-13.339 118.866,-13.349 78.415,-13.318 79.169,-13.318 126.866,-13.27 60.42,-13.172 61.174,-13.145 61.928,-13.145 77.013,-13.031 62.662,-12.972 64.924,-12.962 65.678,-12.962 66.432,-12.962 64.262,-12.954 115.284,-12.806 124.049,-12.724 118.84,-12.595 126.787,-12.52 76.628,-12.382 114.751,-12.272 118.191,-12.212 97.264,-12.189 85.464,-12.168 95.522,-12.072 113.268,-12.082 114.022,-12.082 117.449,-12.075 124.429,-12.072 86.995,-12.065 94.431,-11.994 122.93,-11.955 123.684,-11.955 122.178,-11.903 111.804,-11.869 111.051,-11.849 112.557,-11.829 126.476,-11.833 70.614,-11.77 92.631,-11.725 73.828,-11.628 76.628,-11.628 110.445,-11.399 80.694,-11.35 71.22,-11.322 78.218,-11.32 78.972,-11.32 79.726,-11.308 121.879,-11.211 126.649,-11.099 73.511,-10.944 76.311,-10.944 77.574,-10.928 71.848,-10.905 72.602,-10.905 74.602,-10.905 75.356,-10.905 82.978,-10.723 80.178,-10.704 97.264,-10.681 110.202,-10.685 85.57,-10.667 95.522,-10.564 91.998,-10.444 121.879,-10.457 126.691,-10.346 77.55,-10.174 94.945,-10.079 82.978,-9.969 88.306,-9.969 91.106,-9.966 110.405,-9.959 80.178,-9.95 115.316,-9.943 85.678,-9.921 92.523,-9.903 97.282,-9.779 121.879,-9.703 126.302,-9.701 94.412,-9.546 124.865,-9.502 77.55,-9.42 125.612,-9.397 93.056,-9.37 114.86,-9.343 113.357,-9.254 114.111,-9.254 82.978,-9.215 88.306,-9.215 91.106,-9.212 110.328,-9.209 112.604,-9.208 80.178,-9.196 97.264,-9.173 85.678,-9.167 124.19,-9.166 122.371,-9.132 123.125,-9.127 93.905,-8.987 77.678,-8.677 80.729,-8.519 82.661,-8.531 86.062,-8.518 87.989,-8.531 81.483,-8.492 86.816,-8.492 110.216,-8.463 112.716,-8.462 80.018,-8.459 91.067,-8.459 97.045,-8.451 94.151,-8.275 89.019,-8.021 77.97,-7.982 96.629,-7.823 110.546,-7.785 112.385,-7.784 94.684,-7.742 80.018,-7.705 91.067,-7.705 96.766,-7.081 94.887,-7.015 111.092,-6.862 111.846,-6.861 97.299,-6.548 110.472,-6.433 112.464,-6.428 95.105,-6.294 133.072,-6.205 133.826,-6.205 134.58,-6.205 135.334,-6.205 136.077,-6.078 136.831,-6.078 137.585,-6.078 138.339,-6.078 139.093,-6.078 139.847,-6.071 140.601,-6.068 132.335,-6.045 97.833,-6.015 89.019,-5.759 95.631,-5.753 77.97,-5.72 110.201,-5.729 112.732,-5.724 131.778,-5.538 141.103,-5.506 80.223,-5.471 91.272,-5.471 98.366,-5.482 96.164,-5.22 99.078,-5.233 99.832,-5.233 100.586,-5.233 101.34,-5.233 102.094,-5.233 102.848,-5.233 103.602,-5.233 104.356,-5.233 105.11,-5.233 105.864,-5.233 106.618,-5.233 107.372,-5.233 108.126,-5.233 108.88,-5.233 109.634,-5.233 88.558,-5.162 77.492,-5.137 127.402,-5.09 128.156,-5.09 128.91,-5.09 129.664,-5.09 130.418,-5.09 131.172,-5.09 126.653,-5.001 112.736,-4.97 125.903,-4.923 125.15,-4.875 80.637,-4.842 91.686,-4.842 141.103,-4.752 96.697,-4.687 124.508,-4.48 88.297,-4.455 77.245,-4.425 112.736,-4.216 97.231,-4.154 80.76,-4.098 91.809,-4.098 141.103,-3.998 124.209,-3.788 88.345,-3.702 77.303,-3.673 97.781,-3.639 98.521,-3.492 99.275,-3.492 100.029,-3.492 100.783,-3.492 101.537,-3.492 102.291,-3.492 103.045,-3.492 103.799,-3.492 104.553,-3.492 105.307,-3.492 106.061,-3.492 106.815,-3.492 107.569,-3.492 108.323,-3.492 109.077,-3.492 109.831,-3.492 112.716,-3.462 136.067,-3.436 136.821,-3.436 137.575,-3.436 138.329,-3.436 139.083,-3.436 139.837,-3.443 140.591,-3.444 80.559,-3.371 91.608,-3.371 133.813,-3.332 134.567,-3.332 135.321,-3.33 88.709,-3.041 124.356,-3.048 77.677,-3.019 110.391,-2.987 133.142,-2.989 80.067,-2.8 91.116,-2.8 112.385,-2.784 78.292,-2.582 89.314,-2.593 124.895,-2.521 110.961,-2.494 79.387,-2.473 90.436,-2.473 132.628,-2.437 111.729,-2.413 125.636,-2.382 126.39,-2.382 127.126,-2.217 127.88,-2.216 128.634,-2.216 129.388,-2.216 130.142,-2.216 130.896,-2.216 131.905,-2.223
  other v3: 172.72,-71.12 174.244,-70.993 166.074,-70.824 171.514,-70.751 162.179,-70.739 164.846,-70.739 167.235,-70.679 173.482,-70.104 174.879,-70.104 163.068,-69.977 168.105,-69.881 164.211,-69.85 166.836,-69.845 172.085,-69.85 165.566,-69.7 158.239,-69.192 174.117,-69.215 156.972,-69.088 164.973,-68.834 166.751,-68.834 173.228,-68.707 175.133,-68.707 174.162,-68.067 165.602,-67.995 143.51,-67.818 156.972,-67.818 166.727,-67.814 158.167,-67.669 175.006,-67.31 169.672,-67.183 173.074,-67.124 163.957,-67.056 168.275,-67.056 170.942,-67.056 165.022,-66.979 160.67,-66.943 166.11,-66.907 172.085,-66.929 162.882,-66.871 159.654,-66.834 161.83,-66.834 167.198,-66.762 174.053,-66.653 157.099,-66.548 158.239,-66.435 169.037,-66.294 170.307,-66.167 164.039,-66.015 165.608,-65.913 166.624,-65.786 172.421,-65.71 171.369,-65.601 159.763,-65.565 173.546,-65.565 174.67,-65.565 167.597,-65.528 157.099,-65.405 169.672,-65.405 158.496,-65.278 160.782,-65.278 162.052,-65.278 163.195,-65.278 164.592,-65.278 168.656,-65.278 65.278,-24.13 71.247,-17.272 72.263,-16.002 73.044,-14.972
  other v5: 3,-73 184,-73 3,-4 184,-4
  other v6: 152,-66.2 180.848,-66.2
LNA_ON: R31.2 R84.1 U8.2 U10.2 | length 49.9
  Top Layer, Top w0.23: U10.2@45.654,-14.534 47.3,-14.534 47.879,-15.113 47.879,-16.129 58.094,-26.344 ; U8.2@61.28,-15.184 61.245,-15.219 60.55,-15.219 59.309,-16.46 59.309,-25.129 58.094,-26.344 ; R84.1@72.556,-28.575 71.755,-28.575 71.062,-27.882 v3(58.094,-27.882) 58.094,-26.344
  Bottom Layer, Bottom w0.381: R31.2@56.007,-29.044 56.344,-29.381 57.843,-27.882 v3(58.094,-27.882)
LPF_ON: R85.1 U11.2 U12.2 | length 84.6
  Top Layer, Top w0.23: U11.2@10.089,-31.054 10.089,-29.647 10.033,-29.591 ; U12.2@10.358,-15.809 10.358,-17.709 9.906,-18.161 7.716,-18.161 7.493,-18.384 7.493,-28.194 8.89,-29.591 10.033,-29.591 ; R85.1@73.445,-30.48 71.882,-30.48 70.104,-28.702 66.725,-28.702 66.719,-28.708 25.14,-28.708 23.495,-30.353 17.018,-30.353 16.256,-29.591 10.033,-29.591
MB_ALC: D2.1 J4.10 R12.2 | length 51.5
  Top Layer, Top w0.23: R12.2@101.346,-42.103 101.473,-41.976 101.473,-36.068 102.87,-34.671 v3(113.284,-34.671)
  Bottom Layer, Bottom w0.23: J4.10@98.552,-7.493 99.822,-8.763 99.822,-11.176 112.649,-24.003 D2.1@112.649,-30.988 ; v3(113.284,-34.671) D2.1@113.284,-30.988
MB_THERM: J4.9 R13.2 R14.2 | length 62.5
  Top Layer, Top w0.23: R13.2@106.514,-18.415 106.514,-18.54 107.263,-19.289 107.263,-19.633 v1(107.315,-19.685) ; v3(115.951,-35.941) 116.014,-35.941 118.935,-38.862 v3(118.999,-38.862)
  Bottom Layer, Bottom w0.23: J4.9@98.552,-10.16 98.604,-10.212 98.604,-10.974 v1(107.315,-19.685) 111.887,-24.257 111.887,-35.306 112.522,-35.941 v3(115.951,-35.941) ; v3(118.999,-38.862) 118.999,-43.18 128.524,-52.705 R14.2@128.524,-56.515
NetC5_1: C5.1 C6.2 L2.2 | length 4.8
  Top Layer, Top w0.23: C6.2@28.07,-54.993 28.07,-52.812 L2.2@28.116,-52.766 28.116,-50.272 C5.1@28.07,-50.226
NetC5_2: C5.2 L1.2 U4.4 | length 19.5
  Top Layer, Top w0.23: C5.2@28.07,-48.326 28.07,-45.827 L1.2@28.116,-45.781
  Top Layer, Top w0.381: L1.2@28.116,-45.781 28.116,-42.115 31.115,-39.116 35.306,-39.116 37.805,-36.617 U4.4@37.805,-35.289
NetC6_1: C6.1 L3.2 U15.4 | length 8.3
  Top Layer, Top w0.23: L3.2@28.07,-59.797 L3.2@28.116,-59.751 28.116,-56.94 C6.1@28.07,-56.893
  Top Layer, Top w0.381: L3.2@28.07,-59.797 28.153,-59.88 U15.4@28.153,-65.134
NetC7_2: C7.2 C11.1 C14.2 L5.2 L8.1 | length 9.2
  Top Layer, Top w0.23: C11.1@33.577,-51.265 L8.1@33.577,-54.123 35.164,-54.123 C14.2@35.565,-53.722 ; C7.2@35.553,-55.626 35.565,-55.614 C14.2@35.565,-53.722 ; L5.2@35.687,-51.583 35.799,-51.695 35.799,-53.488 C14.2@35.565,-53.722
NetC8_1: C8.1 IC1.5 | length 7.4
  Top Layer, Top w0.5: C8.1@75.129,-12.742 C8.1@75.229,-12.742 ; C8.1@75.314,-12.319 75.314,-12.419 79.913,-17.018 IC1.5@80.645,-17.018
NetC9_1: C9.1 J1.5 | length 5.8
  Top Layer, Top w0.23: C9.1@78.864,-10.16 C9.1@78.994,-10.03
  Top Layer, Top w1: C9.1@78.994,-10.157 J1.5@78.994,-4.5
NetC9_2: C9.2 IC1.3 | length 2.6
  Top Layer, Top w0.381: C9.2@81.463,-10.361 81.664,-10.16 C9.2@81.791,-10.287
  Top Layer, Top w0.5: IC1.3@81.463,-12.659 C9.2@81.463,-10.488
NetC10_1: C10.1 IC2.5 | length 18.3
  Top Layer, Top w0.381: IC2.5@93.132,-15.072 93.153,-15.092 94.34,-15.092 v3(94.361,-15.113)
  Bottom Layer, Bottom w0.7: C10.1@78.743,-14.732 80.648,-16.637 92.837,-16.637 v3(94.361,-15.113)
NetC11_2: C11.2 L7.2 | length 2.4
  Top Layer, Top w0.23: C11.2@33.577,-49.365 L7.2@33.577,-46.933
NetC12_1: C12.1 C15.2 L6.2 U15.14 | length 19.7
  Top Layer, Top w0.23: C12.1@33.577,-59.838 L6.2@35.687,-59.838 35.687,-61.86 C15.2@35.487,-62.06
  Top Layer, Top w0.381: U15.14@26.203,-71.01 26.238,-70.975 26.238,-70.155 29.337,-67.056 33.528,-67.056 35.56,-65.024 35.56,-62.133 C15.2@35.487,-62.06
NetC12_2: C12.2 L8.2 | length 2.1
  Top Layer, Top w0.23: C12.2@33.577,-57.938 L8.2@33.577,-55.823
NetC13_2: C13.2 L4.2 L7.1 U4.14 | length 7.9
  Top Layer, Top w0.23: L7.1@33.577,-45.233 35.169,-45.233 C13.2@35.487,-44.915 35.487,-46.62 L4.2@35.687,-46.82
  Top Layer, Top w0.381: C13.2@35.487,-44.915 35.855,-44.547 U4.14@35.855,-41.165
NetC16_1: C16.1 J5.5 | length 5.7
  Top Layer, Top w0.23: C16.1@90.043,-10.03 C16.1@90.046,-10.033
  Top Layer, Top w1: C16.1@90.043,-10.157 J5.5@90.043,-4.5
NetC16_2: C16.2 IC2.3 | length 6.7
  Top Layer, Top w0.5: C16.2@86.738,-10.16 C16.2@86.992,-9.906 ; C16.2@86.804,-10.477 86.233,-11.049 86.233,-13.843 86.812,-14.422 IC2.3@88.732,-14.422 ; C16.2@87.246,-10.033 C16.2@87.249,-10.036
NetC17_1: C17.1 IC1.8 | length 1.3
  Top Layer, Top w0.381: IC1.8@82.763,-17.059 83.058,-17.059 ; C17.1@83.766,-17.094 C17.1@83.944,-17.272
  Top Layer, Top w0.7: 83.058,-17.059 83.093,-17.094 C17.1@83.766,-17.094
NetC18_1: C18.1 IC2.8 | length 3.2
  Top Layer, Top w0.381: IC2.8@93.132,-13.122 93.607,-13.122 IC2.8@93.642,-13.087 ; C18.1@93.642,-11.788 93.722,-11.707 C18.1@93.722,-10.958
  Top Layer, Top w0.5: IC2.8@93.642,-13.087 C18.1@93.642,-11.788
  Top Layer, Top w0.7: C18.1@93.214,-10.958 C18.1@93.722,-10.958
NetC20_2: C20.2 L12.2 | length 2.1
  Top Layer, Top w0.23: C20.2@41.504,-49.335 L12.2@41.504,-47.22
NetC21_1: C21.1 C24.2 C27.2 L11.2 U15.17 | length 25.9
  Top Layer, Top w0.23: C21.1@41.504,-60.125 43.389,-60.125 43.389,-62.005 C27.2@43.414,-62.03
  Top Layer, Top w0.381: U15.17@28.153,-71.01 28.188,-70.975 28.188,-69.748 29.736,-68.199 38.227,-68.199 43.414,-63.012 C27.2@43.414,-62.157 ; L11.2@43.389,-58.347 43.414,-58.372 C24.2@43.414,-60.252
NetC21_2: C21.2 L13.2 | length 2.4
  Top Layer, Top w0.23: C21.2@41.504,-58.225 L13.2@41.504,-55.792
NetC22_2: C22.2 C25.2 L9.2 L12.1 U4.17 | length 12.7
  Top Layer, Top w0.23: L12.1@41.504,-45.52 43.573,-45.52 43.731,-45.361 43.731,-47.306 C22.2@43.726,-47.311
  Top Layer, Top w0.381: U4.17@37.805,-41.165 37.84,-41.2 37.84,-41.907 38.858,-42.926 39.751,-42.926 40.969,-44.144 40.969,-45.11 41.379,-45.52 L12.1@41.504,-45.52 ; L9.2@43.576,-49.893 43.581,-49.888 C22.2@43.581,-47.943
NetC32_1: C32.1 C35.2 L15.2 L18.1 | length 6.7
  Top Layer, Top w0.23: C32.1@49.192,-51.229 L18.1@49.192,-53.769 51.334,-53.769 C35.2@51.415,-53.85 51.415,-52.058 L15.2@51.527,-51.945
NetC32_2: C32.2 L17.2 | length 2.3
  Top Layer, Top w0.23: C32.2@49.192,-49.329 L17.2@49.192,-46.989
NetC33_1: C33.1 C36.2 C39.2 L16.2 U17.7 | length 12.2
  Top Layer, Top w0.23: C33.1@49.192,-59.802 C36.2@51.077,-59.802 ; C39.2@51.077,-61.681 C39.2@51.102,-61.707
  Top Layer, Top w0.381: L16.2@51.303,-57.404 51.328,-57.429 C36.2@51.328,-59.309 C39.2@51.328,-61.214 51.788,-61.674 51.788,-62.642 52.011,-62.865 53.848,-62.865 54.778,-63.795 U17.7@54.778,-65.134
NetC33_2: C33.2 L18.2 | length 2.4
  Top Layer, Top w0.23: C33.2@49.192,-57.902 L18.2@49.192,-55.469
NetC34_2: C34.2 C37.2 L14.2 L17.1 U16.7 | length 30.9
  Top Layer, Top w0.23: L17.1@49.192,-45.289 51.104,-45.289 C37.2@51.42,-44.973
  Top Layer, Top w0.381: C37.2@51.42,-45.387 C34.2@51.42,-47.292 51.42,-49.182 L14.2@51.435,-49.197 ; C37.2@51.42,-44.973 51.42,-44.211 57.912,-37.719 69.977,-37.719 70.907,-36.789 U16.7@70.907,-35.416
NetC38_1: C38.1 R27.2 R34.1 R42.2 | length 6.7
  Top Layer, Top w0.381: R42.2@146.703,-65.127 146.747,-65.084 146.812,-65.018 v3(146.812,-63.754)
  Top Layer, Top w1: C38.1@144.688,-65.575 145.135,-65.127 R42.2@146.703,-65.127 ; R42.2@146.747,-65.084 R34.1@148.077,-65.084
  Bottom Layer, Bottom w0.381: v3(146.812,-63.754) R27.2@146.812,-62.037
NetC38_2: C38.2 T5.3 T5.9 | length 5.5
  Top Layer, Top w0.76: T5.9@137.716,-66.645 138.653,-65.708
  Top Layer, Top w1: 138.653,-65.708 139.233,-65.708 T5.3@139.427,-65.515 C38.2@142.727,-65.515
NetC44_1: C44.1 C47.2 C50.2 C52.1 L20.2 L23.1 | length 10.6
  Top Layer, Top w0.23: C52.1@56.273,-52.24 C44.1@58.496,-52.24 ; L23.1@58.496,-54.463 C44.1@58.496,-52.24 ; C50.2@60.626,-54.422 C47.2@60.626,-52.517 ; L20.2@60.831,-50.612 60.626,-50.817 C47.2@60.626,-52.517 ; C44.1@58.496,-52.24 60.349,-52.24 C47.2@60.626,-52.517
NetC44_2: C44.2 C52.2 L22.2 | length 4.3
  Top Layer, Top w0.23: C52.2@56.273,-50.34 C44.2@58.496,-50.34 L22.2@58.496,-48.225
NetC45_1: C45.1 C48.2 C51.2 C53.1 L21.2 U17.4 | length 13.2
  Top Layer, Top w0.381: U17.4@56.728,-65.134 56.728,-60.09 C53.1@56.591,-59.952 56.728,-59.952 C45.1@58.496,-59.952 60.423,-59.952 C51.2@60.66,-60.19 C48.2@60.66,-58.377 60.66,-56.579 L21.2@60.767,-56.472
NetC45_2: C45.2 C53.2 L23.2 | length 3.8
  Top Layer, Top w0.23: C53.2@56.591,-58.052 C45.2@58.496,-58.052 L23.2@58.496,-56.163
NetC46_2: C46.2 C49.2 L19.2 L22.1 U16.4 | length 23.3
  Top Layer, Top w0.23: L22.1@58.496,-46.525 60.381,-46.525 60.381,-44.645 C49.2@60.406,-44.62
  Top Layer, Top w0.381: C49.2@60.406,-44.221 60.406,-43.861 65.151,-39.116 71.374,-39.116 72.857,-37.633 U16.4@72.857,-35.416 ; L19.2@60.447,-48.768 60.472,-48.743 C46.2@60.472,-46.863
NetC58_1: C58.1 C61.2 C64.2 C66.1 L25.2 L28.1 | length 12.6
  Top Layer, Top w0.23: C66.1@65.801,-52.705 C58.1@67.706,-52.705 ; L28.1@67.706,-55.26 C61.2@69.929,-55.26 ; L25.2@69.816,-52.705 69.929,-52.817 C61.2@69.929,-55.26 ; C64.2@69.929,-56.515 C61.2@69.929,-55.26
  Top Layer, Top w0.381: L28.1@67.706,-55.26 C58.1@67.706,-52.705 L25.2@69.816,-52.705
NetC58_2: C58.2 C66.2 L27.2 | length 4.3
  Top Layer, Top w0.23: C66.2@65.801,-50.805 C58.2@67.706,-50.805 L27.2@67.706,-48.388
NetC59_1: C59.1 C62.2 C65.2 C67.1 L26.2 U17.14 | length 27.9
  Top Layer, Top w0.23: C67.1@65.801,-61.595 C65.2@69.616,-61.595
  Top Layer, Top w0.381: U17.14@54.778,-71.01 54.778,-69.174 57.023,-66.929 66.04,-66.929 69.723,-63.246 69.723,-62.337 C65.2@69.616,-62.23 69.616,-61.595 C62.2@69.616,-60.325 69.657,-60.284 L26.2@69.657,-58.42
NetC59_2: C59.2 C67.2 L28.2 | length 4.6
  Top Layer, Top w0.23: C67.2@65.801,-59.695 C59.2@67.706,-59.695 L28.2@67.706,-56.96
NetC60_2: C60.2 C63.2 L24.2 L27.1 U16.14 | length 11.9
  Top Layer, Top w0.381: L27.1@67.706,-46.687 C63.2@69.599,-46.687 ; L24.2@69.784,-50.641 69.743,-50.6 C60.2@69.743,-48.736 C63.2@69.743,-46.831 C63.2@69.599,-46.687 ; U16.14@70.907,-41.292 70.907,-43.52 69.85,-44.577 69.85,-46.437 C63.2@69.599,-46.687
NetC72_1: C72.1 C75.2 C78.2 L30.2 L33.1 | length 8.9
  Top Layer, Top w0.23: C72.1@75.563,-53.032 75.54,-53.054 L33.1@75.54,-55.587 77.445,-55.587 ; C78.2@77.445,-56.842 77.445,-55.587 ; L30.2@77.491,-53.032 77.445,-53.078 C75.2@77.445,-54.937 ; 77.445,-55.587 C75.2@77.445,-54.937 ; 77.445,-55.587 C75.2@77.445,-54.937
NetC72_2: C72.2 L32.2 | length 2.4
  Top Layer, Top w0.23: L32.2@75.54,-48.714 75.563,-48.737 C72.2@75.563,-51.132
NetC73_1: C73.1 C76.2 C79.2 L31.2 U17.17 | length 31.3
  Top Layer, Top w0.381: U17.17@56.728,-71.01 56.728,-69.383 57.912,-68.199 73.279,-68.199 77.761,-63.717 C79.2@77.761,-62.738 ; C73.1@75.54,-61.922 77.707,-61.922 77.761,-61.976 C76.2@77.761,-60.833 77.761,-58.969 L31.2@77.802,-58.928
NetC73_2: C73.2 L33.2 | length 2.7
  Top Layer, Top w0.23: C73.2@75.54,-60.022 L33.2@75.54,-57.287
NetC74_2: C74.2 C77.2 L29.2 L32.1 U16.17 | length 13.6
  Top Layer, Top w0.23: C77.2@77.45,-47.117 77.45,-47.752 C77.2@77.491,-47.793
  Top Layer, Top w0.381: U16.17@72.857,-41.292 72.892,-41.327 72.892,-42.539 75.54,-45.187 L32.1@75.54,-47.014 75.643,-47.117 77.45,-47.117 C77.2@77.744,-47.117 C74.2@77.744,-49.022 77.744,-50.886 L29.2@77.785,-50.927
NetC80_1: C80.1 R38.1 R43.1 R44.2 | length 16.3
  Top Layer, Top w0.381: v3(146.304,-72.136) 146.304,-71.112 R43.1@146.7,-70.716
  Top Layer, Top w1: C80.1@144.444,-70.517 144.496,-70.465 144.747,-70.716 146.304,-70.716 R43.1@146.7,-70.716 148.369,-72.385 R38.1@155.829,-72.385
  Bottom Layer, Bottom w0.381: R44.2@145.542,-70.038 145.642,-70.038 146.102,-70.498 146.102,-71.762 146.304,-71.964 v3(146.304,-72.136)
NetC80_2: C80.2 T5.1 T5.7 | length 5.4
  Top Layer, Top w0.76: T5.7@137.716,-69.185 138.653,-70.122
  Top Layer, Top w1: 138.653,-70.122 139.233,-70.122 T5.1@139.427,-70.315 142.446,-70.315 C80.2@142.596,-70.465
NetC81_1: C81.1 R46.2 | length 2
  Top Layer, Top w1: R46.2@176.765,-68.699 176.866,-68.597 C81.1@176.866,-66.741
NetC81_2: C81.2 C93.1 C94.1 L38.2 Q3.1 R47.1 | length 27.9
  Top Layer, Top w1: Q3.1@170.076,-63.953 172.392,-63.953 ; C94.1@174.108,-46.613 174.124,-46.629 C93.1@176.257,-46.629 176.048,-46.837 L38.2@176.048,-53.491 176.048,-56.589 R47.1@172.392,-60.246 172.392,-63.953 ; C81.2@176.866,-63.942 172.392,-63.953
NetC86_1: C86.1 C87.2 C89.2 L35.2 | length 8.1
  Top Layer, Top w0.23: C87.2@20.764,-55.431 20.764,-51.298 22.804,-51.298 22.809,-51.303 22.809,-49.511 L35.2@22.697,-49.398
NetC86_2: C86.2 C88.2 L34.2 U4.7 | length 23.6
  Top Layer, Top w0.381: C86.2@19.939,-46.881 22.007,-46.881 22.181,-46.707 22.306,-46.707 22.716,-46.297 22.675,-46.256 C88.2@22.675,-44.268 22.675,-42.984 28.194,-37.465 35.179,-37.465 35.855,-36.789 U4.7@35.855,-35.289
NetC87_1: C87.1 C90.2 L36.2 U15.7 | length 12.2
  Top Layer, Top w0.23: C87.1@20.764,-60.424 20.764,-58.974 22.875,-58.974 L36.2@22.875,-59.558 22.875,-61.422 C90.2@22.833,-61.463
  Top Layer, Top w0.381: C90.2@22.833,-61.463 22.833,-61.922 24.158,-63.246 25.146,-63.246 26.289,-64.389 U15.7@26.289,-65.614